# EAGLE board rev3 (EAGLE 6.4)
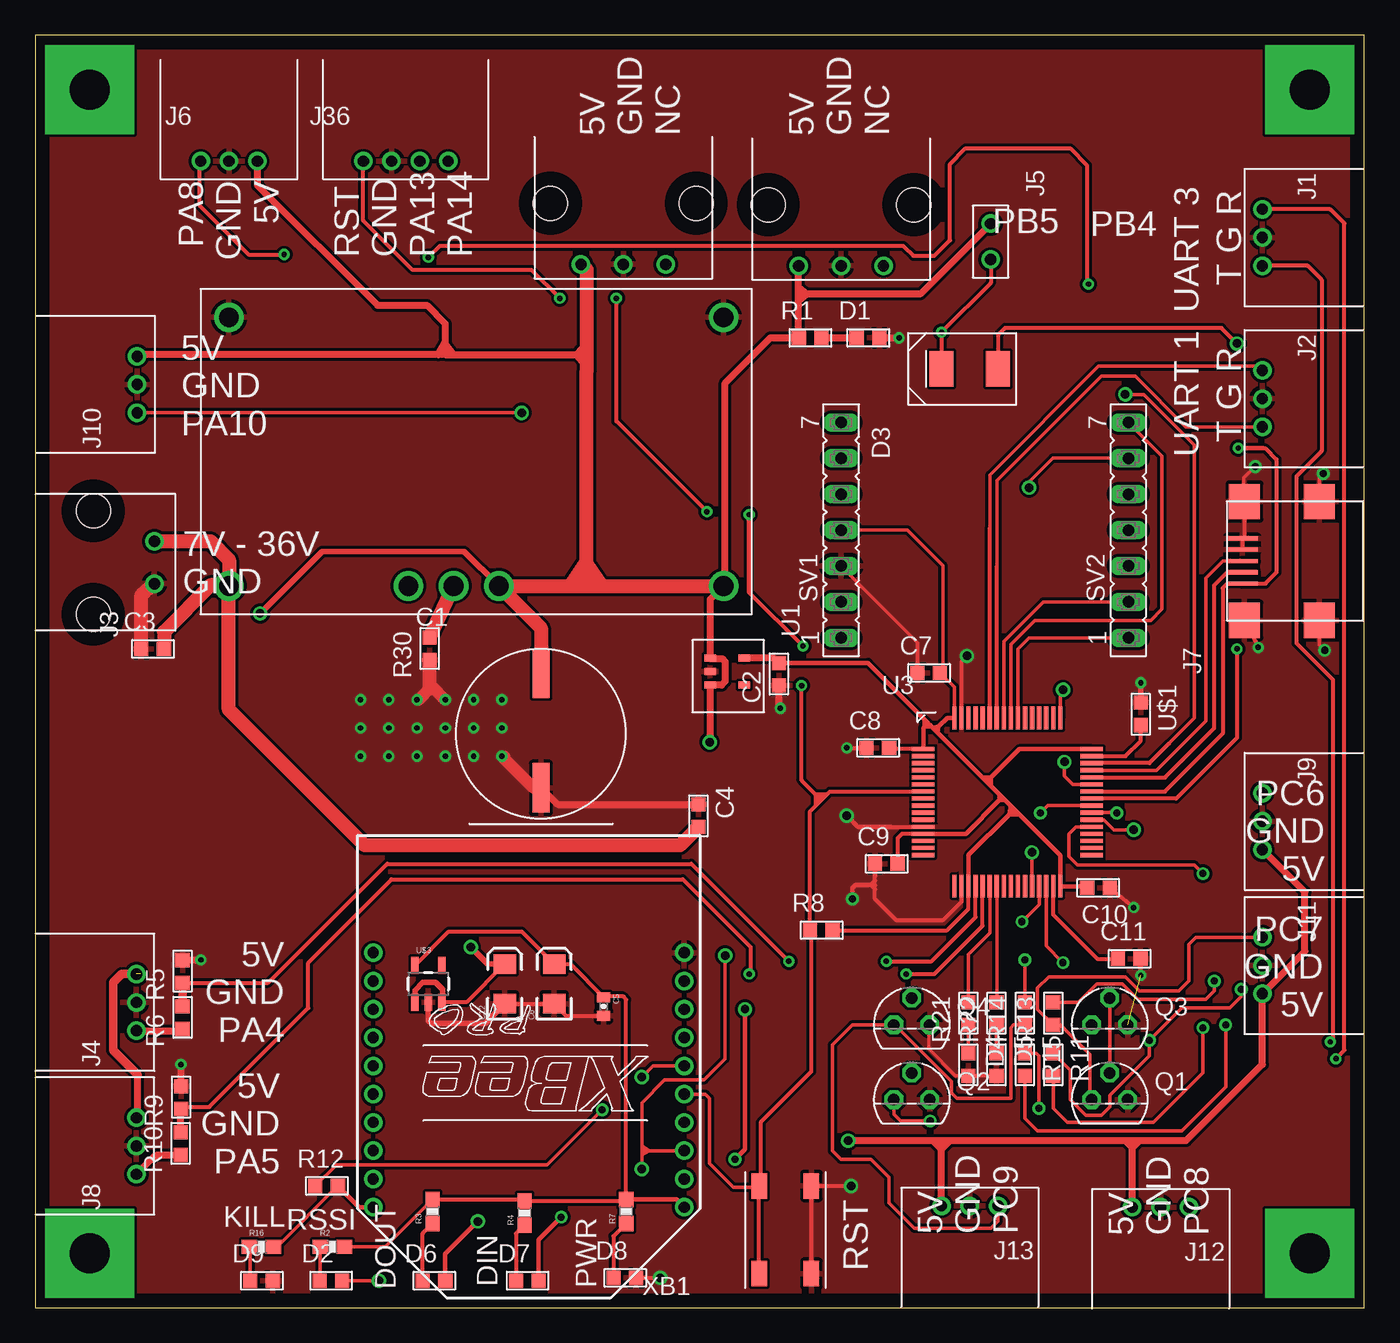
[diagram p0: board, top side]
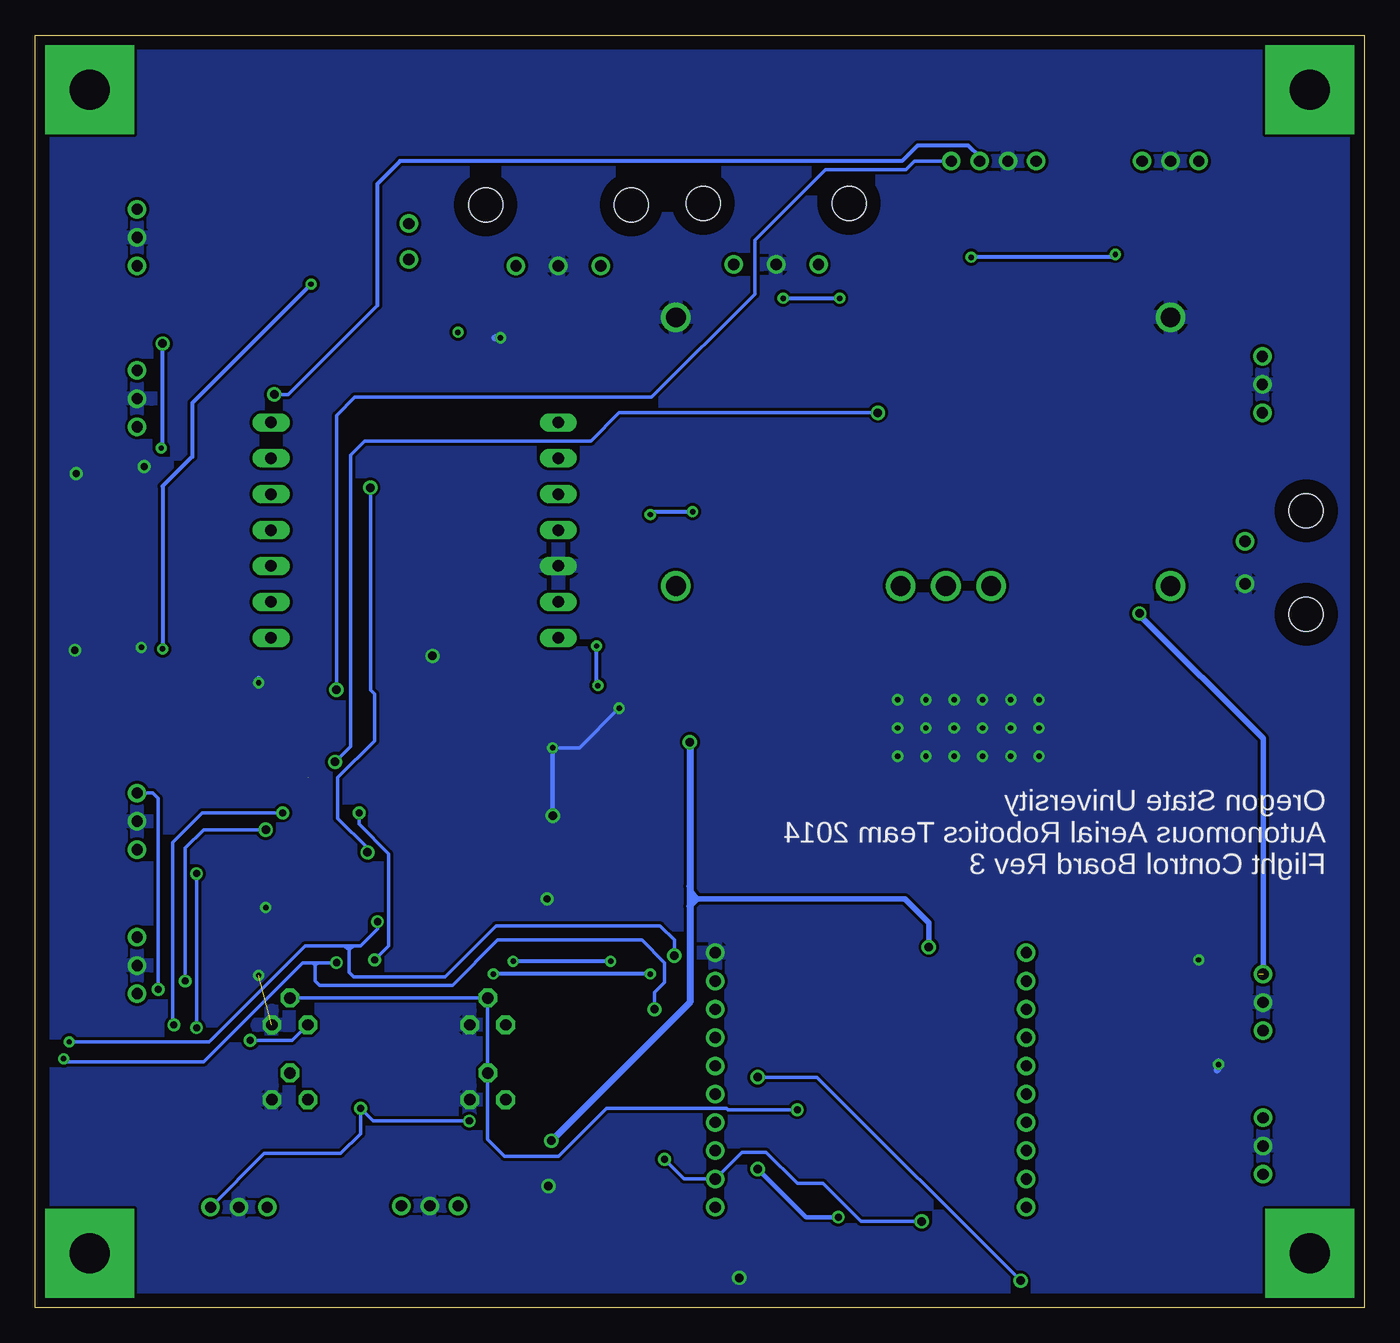
[diagram p1: board, bottom side, seen from below]

Size 94 x 90 mm. Coordinates in mm from the lower left corner, seen from the top.
Outline: 0,0 94,0 94,90 0,90 0,0
Copper layers (1*16): Top 0.035mm / dielectric 1.5mm / Bottom 0.035mm
Design rules "default *": minimum track width 10mil, minimum drill 0.3mm, track to track 8mil, track to pad 8mil, pad to pad 8mil, via to via 8mil, smd to smd 8mil, copper to edge 40mil, drill to drill 8mil, minimum pad ring 10mil, minimum via ring 8mil, stop-mask expansion 4mil, vias tented up to drill 0mil, thermal gap 10mil

## Footprints (pad centres in the part's own frame; a part is rotated, then mirrored left to right if it is on the bottom)
SM_BUTTON = smd 1.8 x 1.1: P$1 0,0; P$2 6.2,0; P$3 0,3.7; P$4 6.2,3.7
330UF-CAPACITOR = smd 1.2 x 3.5: P$1 0,0; P$2 0,8.1
0603-CAPACITOR = smd 1 x 1: P$1 0,0; P$2 1.6,0
0402-CAP = smd 0.7 x 0.9: 1 -0.65,0; 2 0.65,0
EIA3216 = smd 1.4 x 1.6: A 1.4,0; C -1.4,0
DIODE-DS13004 = smd 2.5 x 1.7: P$1 0,0; P$2 0,4
3-PIN-2MM = drill 0.8: P$1 0,0; P$2 2,0; P$3 4,0
2-PIN-3MM = drill 0.8: P$1 0,0; P$2 3,0 | hole 2.41: -2.16,4.32; 5.15,4.32
2PIN-100MIL = drill 0.8: P$1 0,0; P$2 2.54,0
USB_MINI_B = smd 0.3 x 2.2: 5V 2.6,8.55; D+ 4.2,8.55; D- 3.4,8.55; GND 5.8,8.55; ID 5,8.55 | smd 2.5 x 2.2: GN3 8.4,3.1; GND1 0,8.4; GND2 0,3.1; GND4 8.4,8.4
3-PIN-3MM = drill 0.8: P$1 0,0; P$2 3,0; P$3 6,0 | hole 2.41: -2.16,4.32; 8.15,4.32
4-PIN-2MM = drill 0.8: P$1 0,0; P$2 2,0; P$3 4,0; P$4 6,0
TO92 = drill 0.813 octagon: 1 1.27,0; 2 0,1.905; 3 -1.27,0
0603-RES = smd 1.1 x 1: 1 -0.85,0; 2 0.85,0
FE07 = drill 0.813 long: 1 -7.62,0; 2 -5.08,0; 3 -2.54,0; 4 0,0; 5 2.54,0; 6 5.08,0; 7 7.62,0
TPS73433-SOT5 = smd 0.5 x 0.8: P$1 0,0; P$2 0.95,0; P$3 1.9,0; P$4 0,2.4; P$5 1.9,2.4
LQFP-64-STM32F405 = smd 1.6 x 0.3: P$1 0.4,10.1; P$2 0.4,9.6; P$3 0.4,9.1; P$4 0.4,8.6; P$5 0.4,8.1; P$6 0.4,7.6; P$7 0.4,7.1; P$8 0.4,6.6; P$9 0.4,6.1; P$10 0.4,5.6; P$11 0.4,5.1; P$12 0.4,4.6; P$13 0.4,4.1; P$14 0.4,3.6; P$15 0.4,3.1; P$16 0.4,2.6; P$33 12.3,2.6; P$34 12.3,3.1; P$35 12.3,3.6; P$36 12.3,4.1; P$37 12.3,4.6; P$38 12.3,5.1; P$39 12.3,5.6; P$40 12.3,6.1; P$41 12.3,6.6; P$42 12.3,7.1; P$43 12.3,7.6; P$44 12.3,8.1; P$45 12.3,8.6; P$46 12.3,9.1; P$47 12.3,9.6; P$48 12.3,10.1 | smd 0.3 x 1.6: P$17 2.6,0.4; P$18 3.1,0.4; P$19 3.6,0.4; P$20 4.1,0.4; P$21 4.6,0.4; P$22 5.1,0.4; P$23 5.6,0.4; P$24 6.1,0.4; P$25 6.6,0.4; P$26 7.1,0.4; P$27 7.6,0.4; P$28 8.1,0.4; P$29 8.6,0.4; P$30 9.1,0.4; P$31 9.6,0.4; P$32 10.1,0.4; P$49 10.1,12.3; P$50 9.6,12.3; P$51 9.1,12.3; P$52 8.6,12.3; P$53 8.1,12.3; P$54 7.6,12.3; P$55 7.1,12.3; P$56 6.6,12.3; P$57 6.1,12.3; P$58 5.6,12.3; P$59 5.1,12.3; P$60 4.6,12.3; P$61 4.1,12.3; P$62 3.6,12.3; P$63 3.1,12.3; P$64 2.6,12.3
WIDE_IN_REG = drill 1.4: P$1A 2,21; P$2A 2,2; P$3A 14.7,2; P$4A 17.9,2; P$5A 21.1,2; P$6A 37,2; P$7A 37,21
SOT23-5 = smd 0.55 x 1.2: 1 -0.95,-1.3; 2 0,-1.3; 3 0.95,-1.3; 4 0.95,1.3; 5 -0.95,1.3
XBEE-PRO = drill 0.8 pad 1.27: 1 -11,9; 2 -11,7; 3 -11,5; 4 -11,3; 5 -11,1; 6 -11,-1; 7 -11,-3; 8 -11,-5; 9 -11,-7; 10 -11,-9; 11 11,-9; 12 11,-7; 13 11,-5; 14 11,-3; 15 11,-1; 16 11,1; 17 11,3; 18 11,5; 19 11,7; 20 11,9

## Placement (x,y rotation side)
B1  SM-BUTTON  [SM_BUTTON]  51.2,8.6 270 top
C1  CAPACITOR-330UF  [330UF-CAPACITOR]  35.77,36.77 0 top
C2  2.2UF-CAP  [0603-CAPACITOR]  52.6,44 90 top
C3  2.2UF-CAP  [0603-CAPACITOR]  7.5,46.6 0 top
C4  2.2UF-CAP  [0603-CAPACITOR]  46.9,35.6 270 top
C5  .1uF  [0402-CAP]  40.2,21.3 270 top
C6  10uF  [EIA3216]  36.7,22.9 90 top
C7  CAPACITOR-.1UF-4V  [0603-CAPACITOR]  62.4,44.9 0 top
C8  CAPACITOR-.1UF-4V  [0603-CAPACITOR]  58.8,39.6 0 top
C9  CAPACITOR-.1UF-4V  [0603-CAPACITOR]  59.4,31.4 0 top
C10  4.7UF-CAP6.3V  [0603-CAPACITOR]  76,29.7 180 top
C11  2.2UF-CAP  [0603-CAPACITOR]  76.58,24.68 0 top
C12  10uF  [EIA3216]  33.2,22.9 90 top
D1  RED_LED  [0603-CAPACITOR]  58.1,68.6 0 top
D2  RED_LED  [0603-CAPACITOR]  20.1,1.9 0 top
D3  B240A-DIODE  [DIODE-DS13004]  68.1,66.4 90 top
D4  RED_LED  [0603-CAPACITOR]  66,18 270 top
D5  ORANGE_LED  [0603-CAPACITOR]  68,18 270 top
D6  RED_LED  [0603-CAPACITOR]  27.4,1.9 0 top
D7  RED_LED  [0603-CAPACITOR]  34,1.9 0 top
D8  RED_LED  [0603-CAPACITOR]  40.9,2.1 0 top
D9  RED_LED  [0603-CAPACITOR]  15.2,1.9 0 top
J1  3-PIN-SHERLOCK  [3-PIN-2MM]  86.8,77.7 270 top
J2  3-PIN-SHERLOCK  [3-PIN-2MM]  86.8,66.3 270 top
J3  2-PIN-POWER  [2-PIN-3MM]  8.42,51.21 90 top
J4  3-PIN-SHERLOCK  [3-PIN-2MM]  7.15,19.59 90 top
J5  2-PIN-100MIL  [2PIN-100MIL]  67.58,76.68 270 top
J6  3-PIN-SHERLOCK  [3-PIN-2MM]  11.7,81.1 0 top
J7  USB_MINI_B  [USB_MINI_B]  93.93,48.62 90 top
J8  3-PIN-SHERLOCK  [3-PIN-2MM]  7.15,9.43 90 top
J9  3-PIN-SHERLOCK  [3-PIN-2MM]  86.8,36.4 270 top
J10  3-PIN-SHERLOCK  [3-PIN-2MM]  7.2,63.3 90 top
J11  3-PIN-SHERLOCK  [3-PIN-2MM]  86.8,26.2 270 top
J12  3-PIN-SHERLOCK  [3-PIN-2MM]  81.6,7.1 180 top
J13  3-PIN-SHERLOCK  [3-PIN-2MM]  68.1,7.2 180 top
J33  3-PIN-3MM  [3-PIN-3MM]  54,73.7 0 top
J34  3-PIN-3MM  [3-PIN-3MM]  38.6,73.8 0 top
J36  4-PIN-SHERLOCK  [4-PIN-2MM]  23.2,81.1 0 top
Q1  2N3904  [TO92]  76,14.7 0 top
Q2  2N3904  [TO92]  62,14.7 0 top
Q3  2N3904  [TO92]  76,20 0 top
Q4  2N3904  [TO92]  62,20 0 top
R1  RESISTOR-4.7K-25V  [0603-CAPACITOR]  54,68.6 0 top
R2  1K  [0603-RES]  21,4.3 0 top
R3  1K  [0603-RES]  28.1,6.8 90 top
R4  1K  [0603-RES]  34.6,6.7 90 top
R5  10K_RESISTOR  [0603-CAPACITOR]  10.41,22.98 90 top
R6  10K_RESISTOR  [0603-CAPACITOR]  10.41,19.7 90 top
R7  1K  [0603-RES]  41.8,6.8 90 top
R8  RESISTOR-4.7K-25V  [0603-CAPACITOR]  54.8,26.7 0 top
R9  10K_RESISTOR  [0603-CAPACITOR]  10.31,14.06 90 top
R10  10K_RESISTOR  [0603-CAPACITOR]  10.27,10.8 90 top
R11  RESISTOR-165-25V  [0603-CAPACITOR]  72,18 270 top
R12  RESISTOR-165-25V  [0603-CAPACITOR]  19.8,8.6 0 top
R13  RESISTOR-165-25V  [0603-CAPACITOR]  72,20 90 top
R14  RESISTOR-165-25V  [0603-CAPACITOR]  70,20 90 top
R15  RESISTOR-165-25V  [0603-CAPACITOR]  70,18 270 top
R16  1K  [0603-RES]  16,4.3 0 top
R21  RESISTOR-4.7K-25V  [0603-CAPACITOR]  66,20 90 top
R22  RESISTOR-4.7K-25V  [0603-CAPACITOR]  68,20 90 top
R30  21K_RESISTOR  [0603-CAPACITOR]  27.9,45.8 90 top
SV1  [FE07]  57,55 90 top
SV2  [FE07]  77.32,55 90 top
U1  TPS73433-3.3-REG  [TPS73433-SOT5]  47.74,45.94 270 top
U3  STM32F405RG  [LQFP-64-STM32F405]  62.41,29.41 0 top
U$1  2.2UF-CAP  [0603-CAPACITOR]  78.2,42.8 270 top
U$2  WIDE_IN_REG  [WIDE_IN_REG]  11.69,49.05 0 top
U$3  V_REG_LDOSMD  [SOT23-5]  27.8,22.9 0 top
XB1  XBEE-PRO  [XBEE-PRO]  34.9,16.1 180 top

## Library data of the parts
B1 C1-C4 C7-C11 D1-D9 J1-J13 J33 J34 J36 R1 R5 R6 R8-R15 R21 R22 R30 U1 U3 U$1 U$2 = aerial
C5 C6 C12 R2-R4 R7 R16 U$3 = SparkFun
Q1-Q4 = mes_transistors
SV1 SV2 = con-lsta; OC_FARNELL: unknown; OC_NEWARK: unknown
XB1 = maxstream; MPN: XBP24-AWI-001; OC_FARNELL: 1337916; OC_NEWARK: 42M2667

## Nets
3.3V: C5.1 C6.A R2.2 R3.2 R4.2 R7.2 U$3.5 XB1.1
5V: C1.P$2 C12.A J4.P$3 J5.P$1 J6.P$3 J8.P$3 J9.P$3 J10.P$3 J11.P$3 J12.P$3 J13.P$3 J33.P$1 J34.P$1 R1.P$1 U1.P$1 U1.P$3 U$2.P$5A U$2.P$6A U$3.1 U$3.3
CLKOUT: SV1.1
CPOUT: SV1.2
GND: B1.P$3 B1.P$4 C1.P$1 C2.P$1 C3.P$1 C4.P$1 C5.2 C6.C C7.P$1 C8.P$1 C9.P$1 C10.P$1 C11.P$2 C12.C D1.P$2 D4.P$2 D5.P$2 D8.P$2 D9.P$2 J1.P$2 J2.P$2 J3.P$1 J4.P$2 J6.P$2 J7.GN3 J7.GND J7.GND1 J7.GND2 J7.GND4 J7.ID J8.P$2 J9.P$2 J10.P$2 J11.P$2 J12.P$2 J13.P$2 J33.P$2 J34.P$2 J36.P$2 Q1.1 Q2.1 Q3.1 Q4.1 R5.P$2 R9.P$2 R30.P$1 SV1.3 U1.P$2 U3.P$12 U3.P$18 U3.P$63 U$1.P$1 U$2.P$1A U$2.P$7A U$3.2 XB1.10
KILL: R12.P$2 R16.2 XB1.20
N$1: D2.P$1 R2.1
N$2: D3.P$2 J5.P$2
N$3: J4.P$1 R6.P$1
N$4: D4.P$1 R21.P$1
N$5: R30.P$2 U$2.P$4A
N$6: J8.P$1 R10.P$1
N$7: D5.P$1 R22.P$1
N$8: U3.P$47 U$1.P$2
N$9: C11.P$1 U3.P$31
N$12: D1.P$1 R1.P$2
N$15: D6.P$1 R3.1
N$16: D9.P$1 R16.1
N$19: Q1.2 Q2.2 Q3.2 Q4.2 R12.P$1
N$20: D8.P$1 R7.1
N$22: D7.P$1 R4.1
PA0: U3.P$14
PA1: U3.P$15
PA2: U3.P$16
PA3: U3.P$17
PA4: R5.P$1 R6.P$2 U3.P$20
PA5: R9.P$1 R10.P$2 U3.P$21
PA6: R21.P$2 U3.P$22
PA7: R22.P$2 U3.P$23
PA8: J6.P$1 U3.P$41
PA9: D3.P$1 J7.5V U3.P$42
PA10: J10.P$1 U3.P$43
PA11: J7.D- U3.P$44
PA12: J7.D+ U3.P$45
PA13: J36.P$3 U3.P$46
PA14: J36.P$4 U3.P$49
PA15: U3.P$50
PB0: U3.P$26
PB1: U3.P$27
PB2: SV2.6 U3.P$28
PB3: SV2.1 U3.P$55
PB4: SV2.7 U3.P$56
PB5: SV2.2 U3.P$57
PB6: J2.P$3 U3.P$58
PB7: J2.P$1 U3.P$59
PB10: D7.P$2 J1.P$3 U3.P$29 XB1.3
PB11: D6.P$2 J1.P$1 U3.P$30 XB1.2
PB12: U3.P$33
PB13: U3.P$34
PB14: U3.P$35
PB15: U3.P$36
PC0: U3.P$8
PC1: U3.P$9
PC2: U3.P$10
PC3: U3.P$11
PC4: U3.P$24
PC5: U3.P$25
PC6: R11.P$2 U3.P$37
PC6OUT: J9.P$1 Q3.3 R11.P$1
PC7: R13.P$2 U3.P$38
PC7OUT: J11.P$1 Q1.3 R13.P$1
PC8: R15.P$2 U3.P$39
PC8OUT: J12.P$1 Q2.3 R15.P$1
PC9: R14.P$2 U3.P$40
PC9OUT: J13.P$1 Q4.3 R14.P$1
PC10: U3.P$51
PC11: U3.P$52
PC12: U3.P$53
PC13: U3.P$2
PC14: U3.P$3
PC15: U3.P$4
PD2: U3.P$54
PH0: U3.P$5
PH1: U3.P$6
REGOUT: SV1.7
RSSI: D2.P$2 XB1.6
RST: B1.P$1 B1.P$2 J36.P$1 R8.P$1 U3.P$7 XB1.5
VDD: C2.P$2 C7.P$2 C8.P$2 C9.P$2 C10.P$2 R8.P$2 SV1.4 U1.P$4 U3.P$1 U3.P$13 U3.P$19 U3.P$32 U3.P$48 U3.P$64
VIN: C3.P$2 C4.P$2 J3.P$2 U$2.P$2A

## Tracks (layer width: path | path; a pad name or v marks a point on that pad's centre or on a via)
3.3V
  Top 0.254: R2.2 24.75,4.3 R3.2
  Top 0.3: U$3.5 29.25,26.6 34.4,26.6 C6.A 37.85,24.3 C5.1 40.25,22 41.6,22 41.8,21.8 R7.2 41.7,7.55 R4.2 34.5,7.65 R3.2
  Top 0.305: XB1.1 45.35,7.65 R7.2
5V  (via drill 0.6)  (1 unrouted)
  Top 0.3: C12.A 30.5,21.6 U$3.3
  Top 0.406: C12.A 32,24.3 v30.8,25.5 | v15.9,49.1 20.3,53.5 30.34,53.5 U$2.P$5A | U$3.3 28.8,21.6 28.8,22.5 28.3,23 27.4,23 26.85,22.45 U$3.1
  Top 0.5: J8.P$3 arc45 7.25,13.67 7.25,16.45 | 29,67.42 39,67.42 | 39,66.3 39,67.42 | 39,67.42 39,68.2 | v47.7,40 47.74,40.04 U1.P$3 48.54,44.04 48.8,44.3 48.8,45.7 48.6,45.9 47.78,45.9 U1.P$1 47.74,50.1 U$2.P$6A 48.8,51.16 48.8,65.4 52,68.6 R1.P$1 54,71.2 | J9.P$3 89.8,29.4 89.8,25.2 J11.P$3 86.8,17.2 81.4,11.8 78.1,11.8 | 54,71.2 54,71.8 | 54,71.8 54,72.2 | 54,72.2 J33.P$1 | J5.P$1 62.6,71.7 54.6,71.7 | 54.6,71.7 54.1,71.7 54,71.8 | 78.1,11.8 77.6,11.8 | 77.6,11.8 77.1,11.8 | 77.1,11.8 64.7,11.8 | 64.7,11.8 64.1,11.8 | 64.1,11.8 63.5,11.8 | 63.5,11.8 v57.5,11.8 | J12.P$3 77.6,11.3 | 77.6,11.3 77.6,11.8 | 77.1,11.8 77.6,11.3 | 77.6,11.3 78.1,11.8 | J13.P$3 64.1,11.2 | 64.1,11.2 64.1,11.8 | 63.5,11.8 64.1,11.2 | 64.1,11.2 64.7,11.8 | J6.P$3 15.7,79.4 24.2,70.9 27.7,70.9 29,69.6 29,68.3 | 29,68.3 29,68.2 | 29,68.2 29,67.42 | 28.5,67.4 29,68.3 | 29.6,67.4 29,68.2 | 54,72.2 54.6,71.7 | 54,71.2 54.6,71.7 | 38.4,67.5 39,68.2 | 39,68.2 38.3,67.4 38.9,66.7 38.7,67.3 | 29,67.42 7.2,67.42 J10.P$3
  Top 0.6: 7.25,16.45 5.5,18.2 5.5,23 6.1,23.6 7.44,23.6
  Top 1: C1.P$2 35.77,48.07 U$2.P$5A 39.4,51.05 | 39.4,51.05 U$2.P$6A | 39,52.6 39,51.45 39.4,51.05 | 39,52.6 39,66.3 39,73.4 J34.P$1 | 38.2,51.1 39,52.6 | 39,52.6 40,51.1
  Bottom 0.406: v30.8,25.5 30.8,27.2 32.5,28.9 47.2,28.9 | 47.2,28.9 47.7,28.9 47.7,29.8 | v15.9,49.1 15.9,49 7.15,40.25 J4.P$3 | 47.6,29.4 47.2,28.9 | 47.2,28.9 47.7,28.4
  Bottom 0.5: v47.7,40 47.7,29.8 47.7,28.4 47.7,21.6 v57.5,11.8
GND  (via drill 0.38, 0.38 pad 0.25, 0.5, 0.6)  (1 unrouted)
  Top 0.254: Q4.1 63.2,19.93 63.2,18.3 65.1,16.4 D4.P$2 D5.P$2 | C7.P$1 62.4,47.06 SV1.3 | J7.GN3 90.83,58.73 v91.1,59 | J7.GND2 90.83,46.87 v91.2,46.5 | J7.GND4 85.5,57.05 85.5,58.7 v86.3,59.5 | U3.P$63 65.51,45.71 v65.9,46.1
  Top 0.3: v57.4,39.6 C8.P$1 | 60.51,34.01 U3.P$12 | C10.P$1 v77.7,28.3 | J7.GND1 86.53,46.73 v86.5,46.7 | 86.38,56.87 J7.GND4 85.53,54.57 J7.GND J7.ID | B1.P$4 B1.P$3 v57.7,8.6 | C11.P$2 78.18,23.52 v78.2,23.5 | U3.P$18 65.51,28.71 64.2,27.4 60.9,27.4 59.4,28.9 59.4,29.6 59.4,29.9 59.4,30.2 C9.P$1 | C12.C C6.C 37.55,20.65 C5.2 | D8.P$2 44.1,2.1
  Top 0.305: C9.P$1 59.4,30.5 | 60.51,34.01 58.19,34.01 v57.4,34.8 | v57.8,28.9 57.8,29.7 58,29.9 59.1,29.9 | 59.1,29.9 59.4,29.9 | 59.4,29.6 59.1,29.9 | 59.1,29.9 59.4,30.2
  Top 0.406: U$1.P$1 v78.2,44.2 | 35.33,36.77 35.23,36.77 | 27.9,43.9 v27,43 | 28,43.8 28.2,43.8 v29,43 | U$3.2 27.8,20.3 28,20.1 31.8,20.1 C12.C
  Top 0.5: C1.P$1 36.94,35.6 C4.P$1 | C2.P$1 52.6,42.5 v52.7,42.4 | D1.P$2 v61.1,68.6 | R9.P$2 10.31,16.49 v10.3,17.2 | R5.P$2 11.68,24.58 v11.7,24.6
  Top 0.813: 33.2,39 v33,39 35.23,36.77 C1.P$1 | 35.7,36.5 35.7,36.6 | v27,43 27.1,43 28,43.9 28.1,43.9 v29,43
  Top 1: R30.P$1 27.9,43.9 28,43.8 | C3.P$1 7.5,50.39 J3.P$1
  Bottom 0.254: 77.9,28.1 v77.7,28.3 | 57.2,39.6 55.5,39.6 v52.7,42.4 | v91.1,59 91.2,59 | v91.2,46.5 91.3,46.5 | v86.3,59.5 86.5,59.5 | v65.9,46.1 66,46.1
  Bottom 0.3: v57.4,39.6 57.2,39.6 | v86.5,46.7 86.5,46.5
  Bottom 0.305: v57.4,34.8 v57.4,39.6
  Bottom 0.406: v78.2,44.2 78.2,44.5
  Bottom 0.5: v61.1,68.6 61.5,68.6 | v10.3,17.2 10.3,17.4 10.4,16.8 | v11.7,24.6 11.8,24.6
  other vias: 23,41 23,43 23,39 27,39 29,41 44.2,2.1 25,43 25,41 25,39 27,41 29,39 31,43 31,41 31,39 33,43 33,41
  pour Bottom: 0.5,89.5 93.5,89.5 93.5,0.5 0.5,0.5
  pour Top: 21.4,43.9 33.9,43.9 33.9,38.2 21.4,38.2
  pour Top: 0.5,0.5 93.5,0.5 93.5,89.5 0.5,89.5
KILL
  Top 0.254: R16.2 17.1,4.3 R12.P$2
  Top 0.305: R12.P$2 22.9,7.1 XB1.20
N$1
  Top 0.254: R2.1 20.15,1.95 D2.P$1
N$2  (via drill 0.38)
  Top 0.3: D3.P$2 v64.1,69 67.58,72.48 J5.P$2
  Bottom 0.3: 64.1,69.14 v64.1,69
N$3
  Top 0.5: J4.P$1 10.3,19.59 R6.P$1
N$4
  Top 0.254: R21.P$1 D4.P$1
N$5
  Top 1: R30.P$2 U$2.P$4A
N$6
  Top 0.5: J8.P$1 8.37,10.65 arc-45 8.73,10.8 R10.P$1
N$7
  Top 0.254: R22.P$1 D5.P$1
N$8
  Top 0.3: U3.P$47 77.11,39.01 78.2,40.1 U$1.P$2
N$9
  Top 0.3: U3.P$31 72.01,27.79 75.12,24.68 C11.P$1
N$10
  Top 0.305: 62.9,41.2 62.9,41.5
N$12
  Top 0.5: R1.P$2 D1.P$1
N$13  (via drill 2.84 pad 6.3)
  other vias: 3.85,86.15
N$14  (via drill 2.84 pad 6.3)
  other vias: 3.85,3.85
N$15
  Top 0.3: D6.P$1 27.4,5.25 R3.1
N$16
  Top 0.254: R16.1 15.2,4.3 D9.P$1
N$17  (via drill 2.84 pad 6.3)
  other vias: 90.15,86.15
N$18  (via drill 2.84 pad 6.3)
  other vias: 90.15,3.85
N$19  (via drill 0.5)
  Top 0.254: R12.P$1 21.3,10.1 36.2,10.1 v40.1,14 | Q1.2 Q3.2
  Bottom 0.254: Q3.2 Q4.2 Q2.2 62,11.9 60.8,10.7 57,10.7 53.6,14.1 45.1,14.1 45,14 v40.1,14
N$20
  Top 0.3: R7.1 40.9,5.05 D8.P$1
N$21
  Top 1: 37.9,51.1 38.9,52.6
N$22
  Top 0.3: R4.1 34,5.25 D7.P$1
PA4  (via drill 0.38)
  Top 0.3: U3.P$20 66.51,27.61 63.4,24.5 v60.2,24.5 | R5.P$1 16.48,22.98 24.9,31.4 46.4,31.4 v53.3,24.5
  Top 0.6: R6.P$2 R5.P$1
  Bottom 0.3: v53.3,24.5 v60.2,24.5
PA5  (via drill 0.38)
  Top 0.3: U3.P$21 67.01,27.01 63.6,23.6 v61.6,23.6 | R9.P$1 10.35,13.9 | 10.4,14.2 12.3,14.2 19.3,21.2 19.3,24.4 25.2,30.3 45.8,30.3 50.6,25.5 50.6,23.7 v50.5,23.6
  Top 0.5: R10.P$2 10.27,13.82 R9.P$1 | 10.35,13.9 10.4,13.95 10.4,14.2
  Bottom 0.3: v50.5,23.6 v61.6,23.6
PA6
  Top 0.254: U3.P$22 67.51,26.51 66,25 R21.P$2
PA7
  Top 0.254: U3.P$23 R22.P$2
PA8  (via drill 0.38)
  Top 0.3: U3.P$41 80.71,36.01 85,40.3 v85,46.6 | 27.9,74.4 v27.8,74.3 28.6,75.1 61.4,75.1 62.1,74.4 63.6,74.4 64.7,75.5 64.7,80.9 65.8,82 73.2,82 74.4,80.8 74.4,72.5 v74.5,72.4 | v17.6,74.5 15.09,74.5 11.6,77.99 11.6,80.86 arc-45 J6.P$1
  Bottom 0.3: v85,46.6 85,58.1 82.9,60.2 82.9,64 v74.5,72.4 | v27.8,74.3 17.8,74.3 v17.6,74.5
PA9  (via drill 0.38, 0.6 pad 0.41)
  Top 0.3: U3.P$42 79.91,36.51 84,40.6 84,50.9 84.32,51.22 J7.5V 87.02,51.22 87.8,52 87.8,60 87,60.8 v85.1,60.8 86.9,60.8 | 67.9,66.6 D3.P$1 68.1,68.8 68.6,69.3 83.9,69.3 v85,68.2
  Bottom 0.3: v85,68.2 85,60.9 v85.1,60.8
PA10  (via drill 0.6)
  Top 0.254: v72.8,38.6 72.8,37.6 73.39,37.01 U3.P$43 | J10.P$1 v34.4,63.3
  Bottom 0.254: v72.8,38.6 71.7,39.7 71.7,60.3 70.7,61.3 54.7,61.3 52.7,63.3 v34.4,63.3
PA11  (1 unrouted)
  Top 0.3: U3.P$44 | U3.P$44 79.9,37.5 83.4,41 83.4,51.1 84.3,52 86.36,52 J7.D-
PA12
  Top 0.254: 86.36,52.8 84,52.8 82.8,51.6 82.8,41.5 79.3,38 U3.P$45
  Top 0.3: 86.36,52.8 J7.D+
PA13  (via drill 0.6)
  Top 0.254: 80.2,39.9 82,41.7 82,61 78.4,64.6 v77.1,64.6
  Top 0.3: U3.P$46 78.81,38.51 80.2,39.9
  Bottom 0.254: v77.1,64.6 76.1,64.6 69.8,70.9
  Bottom 0.3: J36.P$3 27.2,81.4 28,82.2 31.6,82.2 32.7,81.1 68.2,81.1 69.8,79.5 69.8,70.9
PA14  (via drill 0.6)
  Top 0.254: 72.51,42.51 72.51,43.51 v72.7,43.7
  Top 0.3: 72.51,42.51 U3.P$49
  Bottom 0.254: v72.7,43.7 72.7,63.1 71.4,64.4 50.4,64.4 43.1,71.7 43.1,75.5 38.1,80.5 32.4,80.5 31.8,81.1 J36.P$4
PB2  (via drill 0.6)
  Top 0.254: SV2.6 71.98,60.08 70.3,58.4 v70.3,58 | U3.P$28 v70.51,32.19 v70.5,32.2
  Bottom 0.254: v70.5,32.2 70.5,32.5 72.6,34.6 72.6,37.5 70,40.1 70,43.4 70.3,43.7 v70.3,58
PB3
  Top 0.254: SV2.1 70.28,47.38 69.5,46.6 U3.P$55
PB4
  Top 0.254: U3.P$56 69.01,46.91 70.7,48.6 78.9,48.6 79.7,49.4 79.7,60.24 SV2.7
PB5
  Top 0.254: U3.P$57 68.51,47.11 71.3,49.9 77.3,49.9 SV2.2
PB6
  Top 0.254: J2.P$3 81.4,62.3 77.8,65.9 75.4,65.9 68.01,58.51 68.01,51.8
  Top 0.3: U3.P$58 68.01,51.8 68.01,52.41
PB7
  Top 0.254: 67.51,55.11 67.51,58.91 75.2,66.6 86.5,66.6 J2.P$1
  Top 0.3: U3.P$59 67.51,55.11
PB10  (via drill 0.38, 0.5, 0.6 pad 0.25)
  Top 0.254: U3.P$29 71.01,28.51 v69.8,27.3 | v48.8,24.9 48.8,17.6 47.3,16.1 44.5,16.1 42.9,14.5 42.9,11.4 | 42.9,11.4 42.9,11.1 | 42.9,11.1 42.9,10.8 | 42.9,10.8 v42.9,9.8 | XB1.3 43.4,11.1 | 43.4,11.1 42.9,11.1 | 42.9,10.8 43.4,11.1 | 43.4,11.1 42.9,11.4
  Top 0.3: v91.6,18.8 91.8,19 91.8,44.4 89.2,47 89.2,58.8 91,60.6 91,72.7 90,73.7 J1.P$3
  Top 0.305: D7.P$2 35.6,4.8 v37.2,6.4
  Bottom 0.254: v69.8,27.3 69.8,26.8 71,25.6 71.5,25.6 | 71.5,25.6 71.7,25.6 | 71.7,25.6 72.1,25.6 | 72.1,25.6 72.2,25.6 | 72.2,25.6 74.9,25.6 81.7,18.8 v91.6,18.8 | v48.8,24.9 48.8,26 49.8,27 61.4,27 65,23.4 71.5,23.4 71.8,23.7 71.8,25.3 | 71.8,25.3 71.8,25.4 | 71.8,25.4 71.8,25.5 71.7,25.6 | 71.5,25.6 71.8,25.4 | 71.8,25.4 72.1,25.6 | 71.5,25.6 71.8,25.3 | 71.8,25.3 72.2,25.6
  Bottom 0.305: v37.2,6.4 39.5,6.4 v42.9,9.8
PB11  (via drill 0.38, 0.5, 0.6)
  Top 0.254: U3.P$30 71.51,25.59 v72.7,24.4
  Top 0.3: v92,17.6 92.6,18.2 92.6,76.7 91.6,77.7 J1.P$1
  Top 0.305: D6.P$2 29,3.8 v31.3,6.1 | v50.2,21.1 50.2,11.2 v49.5,10.5
  Bottom 0.254: v92,17.6 91.8,17.4 82.1,17.4 75.1,24.4 74.4,24.4 | v50.2,21.1 50.2,22.3 49.5,23 49.5,24.4 51.1,26 61.3,26 64.5,22.8 73.9,22.8 74.2,23.1 74.2,24.2 | v72.7,24.4 74,24.4 | 74.2,24.2 74,24.4 | 74.2,24.2 74.4,24.4 | 74.4,24.4 74,24.4 | v31.3,6.1 35.6,6.1 38.3,8.8 40.1,8.8 42.3,11 44,11 XB1.2 48.1,9.1 v49.5,10.5
PC6  (via drill 0.5)
  Top 0.254: U3.P$37 73.61,34.01 73.1,33.5 73.1,31.9 73.7,31.3 82,31.3 v82.6,30.7 | v82.6,19.8 82.6,16.6 79.1,13.1 73,13.1 72,14.1 R11.P$2
  Bottom 0.254: v82.6,30.7 v82.6,19.8
PC6OUT  (via drill 0.5)
  Top 0.254: R11.P$1 73.2,16.8 73.2,14.7 74.3,13.6 75.4,13.6 76,14.2 76,15 78.8,17.8 v78.8,18.9 81.1,21.2 84.5,21.2 85.3,22 v85.3,22.5
  Bottom 0.254: J9.P$1 85.7,36.4 85.3,36 v85.3,22.5 | v78.8,18.9 75.83,18.9 Q3.3
PC7  (via drill 0.5, 0.6)
  Top 0.254: v83.4,23.1 83.4,22.4 82.8,21.8 78,21.8 76.9,22.9 75.1,22.9 73.8,21.6 R13.P$2 | U3.P$38 75.49,34.51 75.5,34.5 75.6,34.5 76.3,33.8 v77.7,33.8
  Bottom 0.254: v83.4,23.1 83.4,32.5 82.1,33.8 v77.7,33.8
PC7OUT
  Top 0.254: Q1.3 74.6,14.83 74.6,17.9 72.5,20 R13.P$1 70.9,21.1 70.9,22.6 71.7,23.4 77.1,23.4 78.1,22.4 80.9,22.4 81.6,23.1 81.6,25.7 82.1,26.2 J11.P$1
PC8  (via drill 0.5)
  Top 0.254: U3.P$39 v76.49,35.01 v76.5,35 | v84.2,20 84.2,15.6 81.1,12.5 70.9,12.5 70,13.4 R15.P$2
  Bottom 0.254: v76.5,35 82.2,35 84.3,32.9 84.3,20.1 v84.2,20
PC8OUT  (via drill 0.5)
  Top 0.254: R15.P$1 70.8,18 71,17.8 v71,14.1 | Q2.3 60.73,13.67 61.2,13.2 v63.3,13.2
  Bottom 0.254: J12.P$1 77.8,10.9 72.4,10.9 71,12.3 v71,14.1 70.1,13.2 v63.3,13.2
PC9  (via drill 0.5)
  Top 0.254: U3.P$40 71.61,35.51 v71.1,35 | v70,24.6 R14.P$2
  Bottom 0.254: v71.1,35 71.1,34.2 69,32.1 69,25.6 v70,24.6
PC9OUT
  Top 0.254: R14.P$1 69.2,20 69,19.8 69,14.8 65.2,14.8 64.8,15.2 64.8,16 60.8,20 Q4.3 57.8,20 56.4,18.6 56.4,11.1 57,10.5 59.1,10.5 60.4,9.2 60.4,7.4 62.2,5.6 67.6,5.6 68.1,6.1 J13.P$1
RSSI  (via drill 0.6)
  Top 0.254: XB1.6 43.7,17.1 v42.9,16.3 | v24.3,1.9 D2.P$2
  Bottom 0.254: v42.9,16.3 38.7,16.3 v24.3,1.9
RST  (via drill 0.38)
  Top 0.254: XB1.5 47.4,15.1 47.7,14.8 47.7,10.2 49.4,8.5 51.1,8.5 B1.P$1
  Top 0.3: B1.P$2 B1.P$1 51.3,8.7 51.3,13.1 54.9,16.7 54.9,26.2 R8.P$1 54.8,35.1 55.6,35.9 | U3.P$7 56.21,36.51 55.6,35.9 | J36.P$1 23.2,76.9 26.7,73.4 35.1,73.4 v37.1,71.4 | v41.1,71.4 41.1,62.7 v47.5,56.3 | v50.5,56.1 50.5,50.6 v54.3,46.8 | v54.2,44 54.2,37.3 55.2,36.3 | 55.2,36.3 55.6,35.9 | 55.9,36.3 55.2,36.3 | 55.2,36.3 55.2,35.6 55.6,36.1
  Bottom 0.3: v41.1,71.4 v37.1,71.4 | v47.5,56.3 50.3,56.3 v50.5,56.1 | v54.3,46.8 54.3,44.1 v54.2,44
VDD
  Top 0.254: U3.P$64 65.01,43.89 C7.P$2 64.2,45.1 64.2,52.5 61.7,55 SV1.4
  Top 0.3: U3.P$1 60.49,39.51 C8.P$2 | U3.P$13 61.31,33.51 61,33.2 C9.P$2 | R8.P$2 64.5,26.7 66,28.2 U3.P$19
  Top 0.305: C2.P$2 58.9,45.6 63.15,41.35 | 63.15,41.35 63.3,41.2 | 63.3,41.2 63.4,41.1 | 63.4,41.1 63.5,41 | 63.5,41 63.65,40.85 | 63.65,40.85 63.8,40.7 | 63.8,40.7 67,37.5 | 67,37.5 67.3,37.2 | 67.3,37.2 67.6,36.9 | 67.6,36.9 68.2,36.3 | 68.2,36.3 68.4,36.1 | 68.4,36.1 68.6,35.9 | 68.6,35.9 69,35.5 | 69,35.5 69.25,35.25 | 69.25,35.25 72.5,32 U3.P$32 74.29,29.81 C10.P$2 | U3.P$64 64.51,41.71 63.9,41.1 | 63.9,41.1 63.65,40.85 | U3.P$1 62.81,41.01 63,41.2 | 63,41.2 63.15,41.35 | U3.P$13 65.81,33.51 68.2,35.9 | 68.2,35.9 68.4,36.1 | U3.P$19 66.01,32.01 68.9,34.9 | 68.9,34.9 69.25,35.25 | U3.P$48 69.61,39.51 67.6,37.5 | 67.6,37.5 67.3,37.2 | 69.5,34.9 68.9,34.9 | 68.9,34.9 69,35.5 | 68.2,36.3 68.2,35.9 | 68.2,35.9 68.6,35.9 | 67,37.5 67.6,37.5 | 67.6,37.5 67.6,36.9 | 63.5,41 63.9,41.1 | 63.9,41.1 63.8,40.7 | 63,41.2 63.3,41.2 | 63,41.1 63.4,41.1
  Top 0.5: U1.P$4 52.26,45.94 C2.P$2
VIN
  Top 1: C3.P$2 9.1,47.8 12.4,51.1 13.64,51.1 U$2.P$2A | C4.P$2 45.6,32.7 23.3,32.7 13.69,42.31 U$2.P$2A | J3.P$2 12.39,54.21 13.7,52.9 U$2.P$2A

## Text on the board
tPlace: 5V / GND / NC | 5V / GND / NC | PA8 / GND / 5V | PB5 | PB4 | RST / GND / PA13 / PA14 | T G R | UART 3 | 5V / GND / PA10 | T G R | UART 1 | 7V - 36V / GND | PC6 / GND / 5V | PC7 / GND / 5V | 5V / GND / PA4 | 5V / GND / PA5 | KILL | RSSI | 5V / GND / PC9 | 5V / GND / PC8 | RST | DIN | DOUT | PWR
bPlace: Oregon State University / Autonomous Aerial Robotics Team 2014 / Flight Control Board Rev 3